# EAGLE board logic2 (EAGLE 7.1.0)
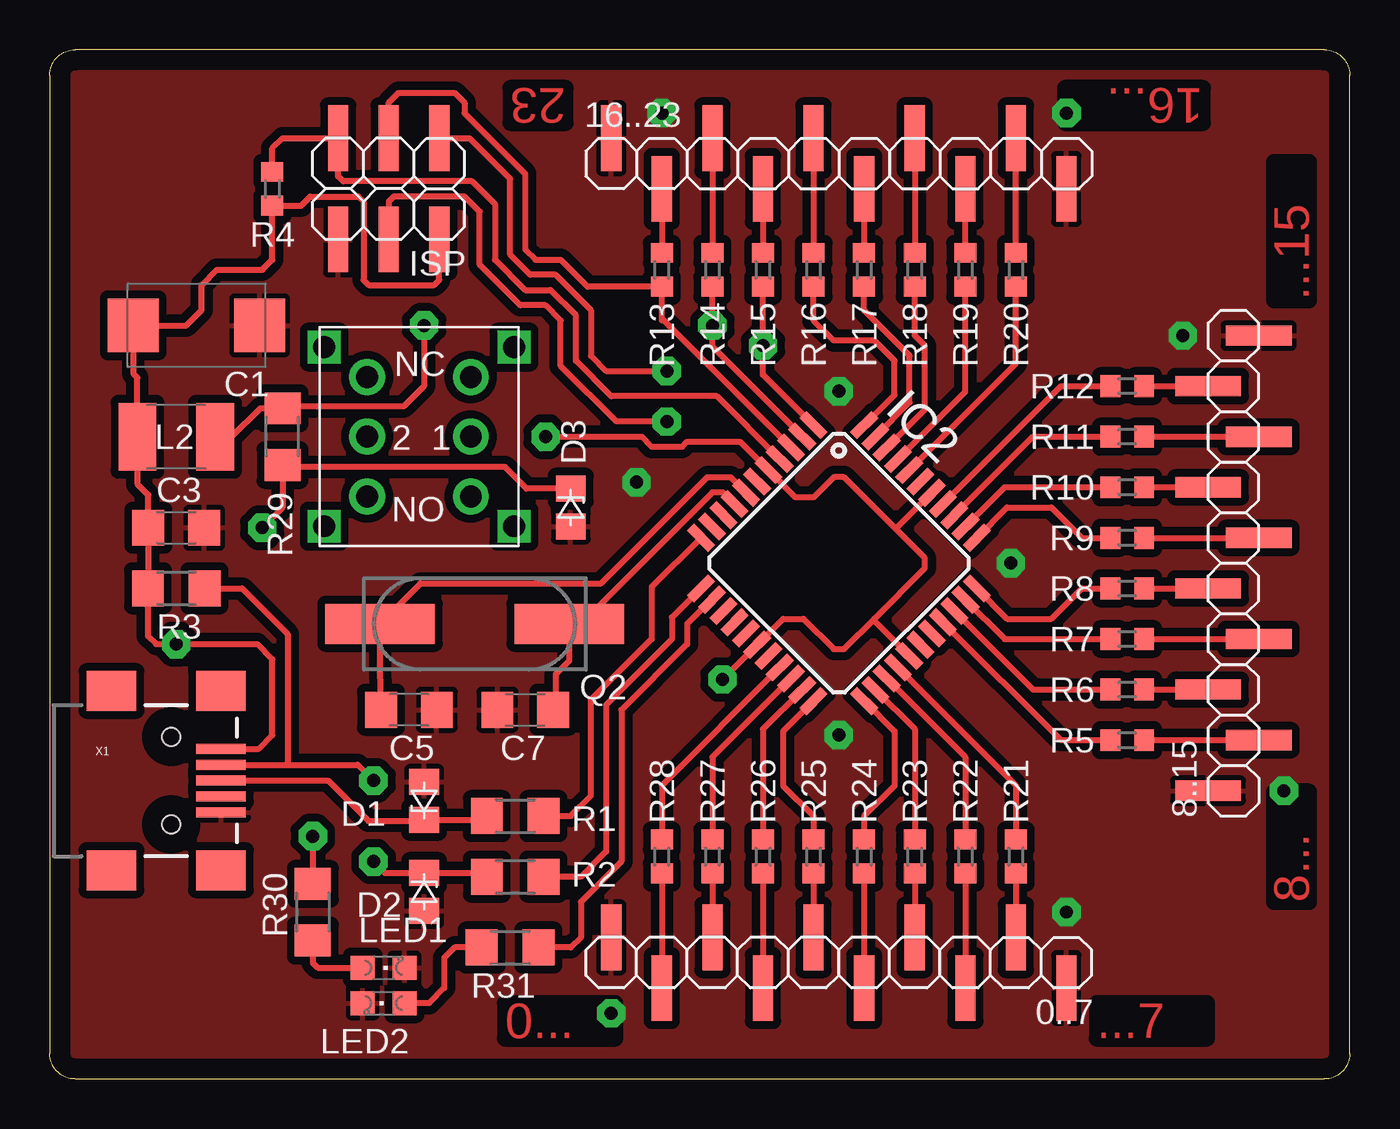
[diagram p0: board, top side]
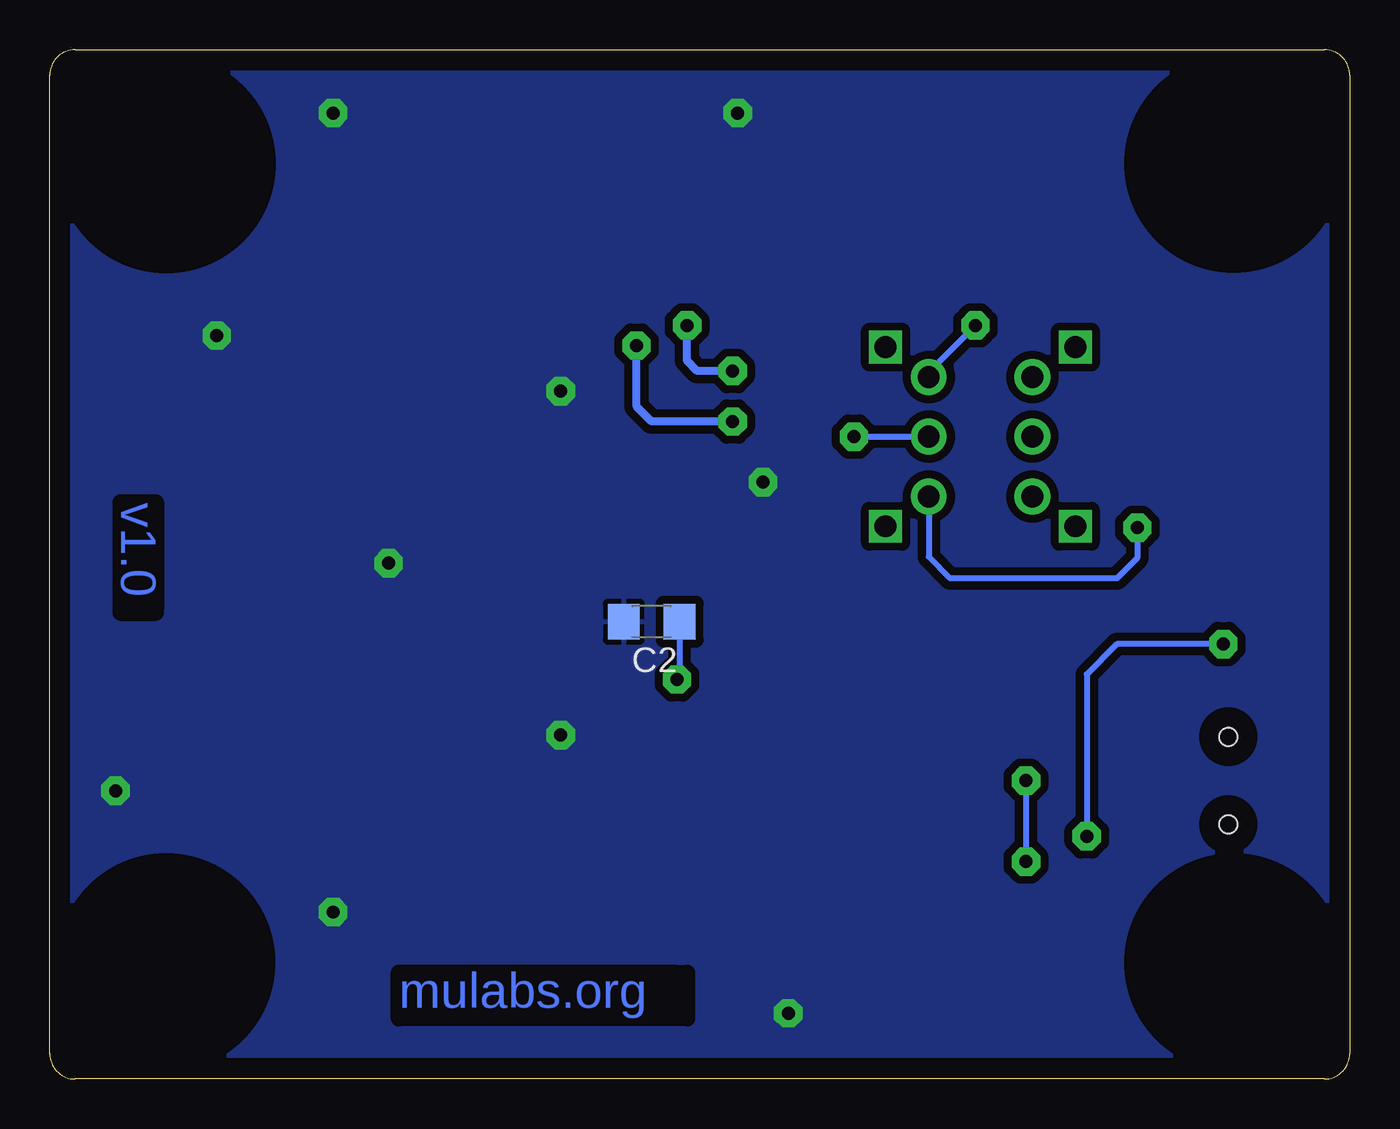
[diagram p1: board, bottom side, seen from below]

Size 65.28 x 51.69 mm. Coordinates in mm from the lower left corner, seen from the top.
Outline: 1.27,0 64.01,0 arc90 65.28,1.27 65.28,50.42 arc90 64.01,51.69 1.27,51.69 arc90 0,50.42 0,1.27 arc90 1.27,0
Copper layers (1*16): Top 0.035mm / dielectric 1.5mm / Bottom 0.035mm
Design rules "default": minimum track width 10mil, minimum drill 24mil, track to track 8mil, track to pad 8mil, pad to pad 8mil, via to via 8mil, smd to smd 8mil, copper to edge 40mil, drill to drill 8mil, minimum pad ring 10mil, minimum via ring 8mil, stop-mask expansion 4mil, vias tented up to drill 0mil, thermal gap 10mil
bRestrict: area 0.8,40.9 to 10.9,51.1; area 0.8,0.8 to 10.9,10.9; area 54.4,0.8 to 64.5,10.9; area 54.3,40.9 to 64.5,51.1; area 33.3,3 to 47.8,5.3; area 59.9,23.6 to 61.7,29

## Footprints (pad centres in the part's own frame; a part is rotated, then mirrored left to right if it is on the bottom)
1X10SMD = smd 1.016 x 3.302: 1 -1.27,1.27; 2 1.27,-1.27; 3 3.81,1.27; 4 6.35,-1.27; 5 8.89,1.27; 6 11.43,-1.27; 7 13.97,1.27; 8 16.51,-1.27; 9 19.05,1.27; 10 21.59,-1.27
D/7343-31R = smd 2.55 x 2.7: + 3.175,0; - -3.175,0
C1206 = smd 1.6 x 1.8: 1 -1.4,0; 2 1.4,0
DIODE-ZENER-0805 = smd 1.3 x 1.5: A -0.95,0; K 0.95,0
TQFP44 = smd 1.5 x 0.5: 1 -5.8,4; 2 -5.8,3.2; 3 -5.8,2.4; 4 -5.8,1.6; 5 -5.8,0.8; 6 -5.8,0; 7 -5.8,-0.8; 8 -5.8,-1.6; 9 -5.8,-2.4; 10 -5.8,-3.2; 11 -5.8,-4; 23 5.8,-4; 24 5.8,-3.2; 25 5.8,-2.4; 26 5.8,-1.6; 27 5.8,-0.8; 28 5.8,0; 29 5.8,0.8; 30 5.8,1.6; 31 5.8,2.4; 32 5.8,3.2; 33 5.8,4 | smd 0.5 x 1.5: 12 -4,-5.8; 13 -3.2,-5.8; 14 -2.4,-5.8; 15 -1.6,-5.8; 16 -0.8,-5.8; 17 0,-5.8; 18 0.8,-5.8; 19 1.6,-5.8; 20 2.4,-5.8; 21 3.2,-5.8; 22 4,-5.8; 34 4,5.8; 35 3.2,5.8; 36 2.4,5.8; 37 1.6,5.8; 38 0.8,5.8; 39 0,5.8; 40 -0.8,5.8; 41 -1.6,5.8; 42 -2.4,5.8; 43 -3.2,5.8; 44 -4,5.8
2X03SMD = smd 1.016 x 3.302: 1 -1.27,-3.81; 2 -1.27,1.27; 3 1.27,-3.81; 4 1.27,1.27; 5 3.81,-3.81; 6 3.81,1.27
L1812 = smd 1.9 x 3.4: 1 -1.95,0; 2 1.95,0
CHIPLED_0805 = smd 1.2 x 1.2: A 0,-1.05; C 0,1.05
CSM-7X-DU = smd 5.5 x 2: 1 -4.75,0; 2 4.75,0
R1206 = smd 1.6 x 1.803: 1 -1.422,0; 2 1.422,0
R0603 = smd 1 x 1.1: 1 -0.85,0; 2 0.85,0
SWITCH-TOP-DPDT = drill 1.1 pad 1.8: 1 0,-2.6; 1NC 3,-2.6; 1NO -3,-2.6; 2 0,2.6; 2NC 3,2.6; 2NO -3,2.6 | drill 1.1 pad 1.422 square: P$7 -4.5,-4.763; P$8 -4.5,4.763; P$9 4.5,-4.763; P$10 4.5,4.763
USB-MINIB = smd 2.5 x 0.5: D+ 2.5,0; D- 2.5,0.8; GND 2.5,-1.6; ID 2.5,-0.8; VBUS 2.5,1.6 | smd 2.5 x 2: MTN1 -3,4.5; MTN2 2.5,4.5; MTN3 -3,-4.5; MTN4 2.5,-4.5 | hole 0.9: 0,2.2; 0,-2.2

## Placement (x,y rotation side)
0..7  [1X10SMD]  49.78,5.84 180 top
8..15  [1X10SMD]  59.44,15.75 90 top
16..23  [1X10SMD]  29.46,45.97 0 top
C1  100µF  [D/7343-31R]  7.37,37.85 180 top
C2  100nF  [C1206]  35.05,22.97 180 bottom
C3  100nF  [C1206]  6.35,27.69 0 top
C5  22p  [C1206]  18.03,18.54 180 top
C7  22p  [C1206]  23.88,18.54 0 top
D1  3.6V  [DIODE-ZENER-0805]  18.8,13.97 270 top
D2  3.6V  [DIODE-ZENER-0805]  18.8,9.4 90 top
D3  3.6V  [DIODE-ZENER-0805]  26.16,28.7 90 top
IC2  ATMEGA32-A,M-A  [TQFP44]  39.62,25.91 315 top
ISP  [2X03SMD]  18.29,43.43 180 top
L2  10µH  [L1812]  6.35,32.26 180 top
LED1  [CHIPLED_0805]  16.76,5.59 270 top
LED2  [CHIPLED_0805]  16.76,3.81 90 top
Q2  16MHz  [CSM-7X-DU]  21.34,22.86 180 top
R1  68Ω  [R1206]  23.37,13.21 180 top
R2  68Ω  [R1206]  23.37,10.16 180 top
R3  1.5k  [R1206]  6.35,24.64 180 top
R4  10kΩ  [R0603]  11.18,44.7 270 top
R5  100Ω  [R0603]  54.1,17.02 180 top
R6  100Ω  [R0603]  54.1,19.56 180 top
R7  100Ω  [R0603]  54.1,22.1 180 top
R8  100Ω  [R0603]  54.1,24.64 180 top
R9  100Ω  [R0603]  54.1,27.18 180 top
R10  100Ω  [R0603]  54.1,29.72 180 top
R11  100Ω  [R0603]  54.1,32.26 180 top
R12  100Ω  [R0603]  54.1,34.8 180 top
R13  100Ω  [R0603]  30.73,40.64 270 top
R14  100Ω  [R0603]  33.27,40.64 270 top
R15  100Ω  [R0603]  35.81,40.64 270 top
R16  100Ω  [R0603]  38.35,40.64 270 top
R17  100Ω  [R0603]  40.89,40.64 270 top
R18  100Ω  [R0603]  43.43,40.64 270 top
R19  100Ω  [R0603]  45.97,40.64 270 top
R20  100Ω  [R0603]  48.51,40.64 270 top
R21  100Ω  [R0603]  48.51,11.18 90 top
R22  100Ω  [R0603]  45.97,11.18 90 top
R23  100Ω  [R0603]  43.43,11.18 90 top
R24  100Ω  [R0603]  40.89,11.18 90 top
R25  100Ω  [R0603]  38.35,11.18 90 top
R26  100Ω  [R0603]  35.81,11.18 90 top
R27  100Ω  [R0603]  33.27,11.18 90 top
R28  100Ω  [R0603]  30.73,11.18 90 top
R29  200Ω  [R1206]  11.68,32.26 270 top
R30  200Ω  [R1206]  13.21,8.38 90 top
R31  200Ω  [R1206]  23.11,6.6 180 top
U$3  SWTICH-DPDT1  [SWITCH-TOP-DPDT]  18.54,32.26 90 top
X1  USBSMD  [USB-MINIB]  6.1,14.99 0 top

## Library data of the parts
0..7 8..15 16..23 ISP = pinhead-1
C1-C3 C5 C7 L2 R1-R31 = rcl
D1-D3 U$3 = mulabs
IC2 = atmega-atxmega; MPN: ATMEGA32-16AU; OC_FARNELL: 9171274; OC_NEWARK: 69K6677
LED1 LED2 = led
Q2 = crystal; OC_FARNELL: unknown; OC_NEWARK: unknown
X1 = SparkFun

## Nets
GND: 0..7.1 0..7.10 8..15.1 8..15.10 16..23.1 16..23.10 C1.- C2.2 C3.2 C5.1 C7.1 D1.A D2.A D3.A IC2.6 IC2.18 IC2.28 IC2.39 ISP.6 LED1.C LED2.C X1.GND
N$1: IC2.12 R2.1
N$2: IC2.11 R1.1
N$3: D1.K R1.2 X1.D+
N$4: D2.K R2.2 R3.1 X1.D-
N$5: C2.1 IC2.5 IC2.17 IC2.27 IC2.38 U$3.1
N$6: IC2.4 ISP.5 R4.1
N$7: IC2.30 R5.2
N$8: IC2.31 R6.2
N$9: IC2.32 R7.2
N$10: IC2.33 R8.2
N$11: IC2.34 R9.2
N$12: LED1.A R30.1
N$13: C7.2 IC2.8 Q2.1
N$14: IC2.35 R10.2
N$15: IC2.36 R11.2
N$16: IC2.37 R12.2
N$17: IC2.3 ISP.3 R13.2
N$18: IC2.2 ISP.1 R14.2
N$19: IC2.44 R16.2
N$20: IC2.1 ISP.4 R15.2
N$21: IC2.43 R17.2
N$22: IC2.42 R18.2
N$23: IC2.40 R20.2
N$24: IC2.41 R19.2
N$25: IC2.26 R21.2
N$26: IC2.25 R22.2
N$27: IC2.23 R24.2
N$28: IC2.21 R26.2
N$29: IC2.19 R28.2
N$30: IC2.24 R23.2
N$31: IC2.22 R25.2
N$32: IC2.20 R27.2
N$33: 8..15.2 R5.1
N$34: 8..15.3 R6.1
N$35: 8..15.4 R7.1
N$36: 8..15.5 R8.1
N$37: 8..15.6 R9.1
N$38: 8..15.7 R10.1
N$39: 8..15.8 R11.1
N$40: 8..15.9 R12.1
N$41: 16..23.2 R13.1
N$42: 16..23.3 R14.1
N$43: 16..23.4 R15.1
N$44: 16..23.5 R16.1
N$45: 16..23.6 R17.1
N$46: 16..23.7 R18.1
N$47: 16..23.8 R19.1
N$48: 16..23.9 R20.1
N$49: 0..7.2 R21.1
N$50: 0..7.3 R22.1
N$51: 0..7.4 R23.1
N$52: 0..7.5 R24.1
N$53: 0..7.6 R25.1
N$54: 0..7.7 R26.1
N$55: 0..7.8 R27.1
N$56: 0..7.9 R28.1
N$57: D3.K R29.2 U$3.1NO
N$58: L2.1 R29.1 U$3.1NC
N$59: C5.2 IC2.7 Q2.2
N$60: IC2.13 R31.1
N$61: LED2.A R31.2
VCC: C1.+ C3.1 ISP.2 L2.2 R3.2 R4.2 R30.2 X1.VBUS

## Tracks (layer width: path | path; a pad name or v marks a point on that pad's centre or on a via)
GND  (via drill 0.65 pad 1.42)
  other vias: 39.62,34.54 39.62,17.27 48.26,25.91 29.46,29.97 28.19,3.3 51.05,8.38 61.98,14.48 56.9,37.34 51.05,48.51 30.73,48.51
  pour Top (isolate 0.406): 0,51.69 65.28,51.69 65.28,0 0,0
  pour Bottom (isolate 0.406): 0,51.69 65.28,51.69 65.28,0 0,0
N$1
  Top 0.305: IC2.12 31.24,23.18 31.24,22.1 27.94,18.8 27.94,11.43 26.67,10.16 R2.1
N$2
  Top 0.305: IC2.11 30.23,24.71 30.23,22.1 27.18,19.05 27.18,14.22 26.16,13.21 R1.1
N$3
  Top 0.305: R1.2 21.76,13.02 D1.K 18.73,12.95 16,12.95 13.97,14.99 X1.D+
N$4  (via drill 0.65 pad 1.42)
  Top 0.305: R2.2 21.76,10.35 D2.K 16.83,10.35 v16.26,10.92 | X1.D- 11.94,15.79 | 11.94,15.79 15.46,15.79 v16.26,14.99 | R3.1 9.65,24.64 11.94,22.35 11.94,15.79
  Bottom 0.305: v16.26,14.99 v16.26,10.92
N$5  (via drill 0.65 pad 1.42)
  Top 0.305: 41.4,23.11 39.88,21.59 39.37,21.59 37.85,23.11 36.83,23.11 IC2.17 v33.78,20.07 | 41.4,23.11 43.94,25.65 43.94,26.16 42.55,27.56 | IC2.38 42.55,27.7 42.55,27.56 | IC2.27 41.4,23 41.4,23.11 | 42.55,27.56 39.88,30.23 39.37,30.23 38.35,29.21 37.45,29.21 IC2.5 34.66,32 32,32 31.75,31.75 30.23,31.75 29.72,32.26 v24.89,32.26
  Bottom 0.305: v24.89,32.26 U$3.1 | C2.1 33.65,20.2 v33.78,20.07
N$6
  Top 0.305: IC2.4 33.51,34.29 28.19,34.29 26.42,36.07 26.42,38.35 25.15,39.62 23.88,39.62 22.35,41.15 22.35,43.94 21.21,45.09 14.73,45.09 14.48,45.34 ISP.5 11.68,47.24 11.18,46.74 R4.1
N$7
  Top 0.305: IC2.30 50.78,17.02 R5.2
N$8
  Top 0.305: IC2.31 49.37,19.56 R6.2
N$9
  Top 0.305: IC2.32 47.96,22.1 R7.2
N$10
  Top 0.305: IC2.33 48.08,23.11 50.29,23.11 51.82,24.64 R8.2
N$11
  Top 0.305: IC2.34 48.08,28.7 50.29,28.7 51.82,27.18 R9.2
N$12
  Top 0.305: R30.1 13.21,5.84 13.46,5.59 LED1.A
N$13
  Top 0.305: IC2.8 33.8,29.46 33.27,29.46 26.67,22.86 Q2.1 26.09,21.01 25.4,20.32 25.4,18.67 C7.2
N$14
  Top 0.305: IC2.35 47.96,29.72 R10.2
N$15
  Top 0.305: IC2.36 49.37,32.26 R11.2
N$16
  Top 0.305: IC2.37 50.78,34.8 R12.2
N$17
  Top 0.305: IC2.3 30.73,38.19 | 30.73,38.19 R13.2 27.01,39.79 25.65,41.15 24.38,41.15 23.88,41.66 23.88,45.47 20.83,48.51 20.83,49.02 20.32,49.53 17.53,49.53 17.02,49.02 ISP.3 | 30.73,38.1 30.73,38.19
N$18  (via drill 0.65 pad 1.42)
  Top 0.305: IC2.2 33.27,36.78 v33.27,37.85 R14.2 | ISP.1 21.08,47.24 23.11,45.21 23.11,41.4 24.13,40.39 25.4,40.39 27.18,38.61 27.18,36.32 27.94,35.56 v30.99,35.56
  Bottom 0.406: v30.99,35.56 32.77,35.56 33.27,36.07 v33.27,37.85
N$19
  Top 0.305: IC2.44 42.42,34.36 42.42,36.07 41.4,37.08 39.37,37.08 38.35,38.1 R16.2
N$20  (via drill 0.65 pad 1.42)
  Top 0.305: IC2.1 35.81,35.38 v35.81,36.83 R15.2 | v30.99,33.02 28.45,33.02 25.65,35.81 25.65,38.1 24.89,38.86 23.62,38.86 21.59,40.89 21.59,43.56 20.83,44.32 17.27,44.32 17.02,44.07 ISP.4
  Bottom 0.406: v30.99,33.02 35.05,33.02 35.81,33.78 v35.81,36.83
N$21
  Top 0.305: IC2.43 43.18,33.99 43.18,36.32 40.89,38.61 R17.2
N$22
  Top 0.305: IC2.42 43.94,33.62 43.94,36.83 43.43,37.34 R18.2
N$23
  Top 0.305: IC2.40 48.51,35.93 R20.2
N$24
  Top 0.305: IC2.41 45.97,34.52 R19.2
N$25
  Top 0.305: IC2.26 48.51,14.76 R21.2
N$26
  Top 0.305: IC2.25 45.97,16.16 R22.2
N$27
  Top 0.305: IC2.23 42.42,17.46 42.42,14.73 40.89,13.21 R24.2
N$28
  Top 0.305: IC2.21 35.81,17.57 R26.2
N$29
  Top 0.305: IC2.19 30.73,14.76 R28.2
N$30
  Top 0.305: IC2.24 43.43,17.57 R23.2
N$31
  Top 0.305: IC2.22 36.83,17.46 36.83,14.73 38.35,13.21 R25.2
N$32
  Top 0.305: IC2.20 33.27,16.16 R27.2
N$33
  Top 0.305: R5.1 8..15.2
N$34
  Top 0.305: R6.1 8..15.3
N$35
  Top 0.305: R7.1 8..15.4
N$36
  Top 0.305: R8.1 8..15.5
N$37
  Top 0.305: R9.1 8..15.6
N$38
  Top 0.305: R10.1 8..15.7
N$39
  Top 0.305: R11.1 8..15.8
N$40
  Top 0.305: R12.1 8..15.9
N$41
  Top 0.305: 16..23.2 R13.1
N$42
  Top 0.305: 16..23.3 R14.1
N$43
  Top 0.305: 16..23.4 R15.1
N$44
  Top 0.305: 16..23.5 R16.1
N$45
  Top 0.305: 16..23.6 R17.1
N$46
  Top 0.305: 16..23.7 R18.1
N$47
  Top 0.305: R19.1 16..23.8
N$48
  Top 0.305: R20.1 16..23.9
N$49
  Top 0.305: R21.1 0..7.2
N$50
  Top 0.305: R22.1 0..7.3
N$51
  Top 0.305: R23.1 0..7.4
N$52
  Top 0.305: R24.1 0..7.5
N$53
  Top 0.305: R25.1 0..7.6
N$54
  Top 0.305: R26.1 0..7.7
N$55
  Top 0.305: R27.1 0..7.8
N$56
  Top 0.305: R28.1 0..7.9
N$57  (via drill 0.65 pad 1.42)
  Top 0.305: v10.67,27.69 11.68,28.7 R29.2 11.79,30.73 22.86,30.73 23.94,29.65 D3.K
  Bottom 0.305: v10.67,27.69 10.67,26.16 11.68,25.15 20.07,25.15 21.14,26.22 U$3.1NO
N$58  (via drill 0.65 pad 1.42)
  Top 0.305: L2.1 9.14,32.26 10.57,33.68 R29.1 11.79,33.78 17.78,33.78 18.8,34.8 v18.8,37.85
  Bottom 0.305: U$3.1NC 21.14,35.5 v18.8,37.85
N$59
  Top 0.305: C5.2 16.59,20.62 Q2.2 18.62,24.89 27.69,24.89 33.02,30.23 34.17,30.23 IC2.7
N$60
  Top 0.305: IC2.13 33.21,24.07 32,22.86 32,21.84 28.7,18.54 28.7,10.92 26.67,8.89 26.67,7.11 26.16,6.6 R31.1
N$61
  Top 0.305: R31.2 20.32,6.6 19.81,6.1 19.81,4.57 19.05,3.81 LED2.A
VCC  (via drill 0.65 pad 1.42)
  Top 0.305: R4.2 12.61,43.85 13.08,44.32 15.49,44.32 15.75,44.07 15.75,40.13 16,39.88 19.3,39.88 19.56,40.13 ISP.2 | 11.14,43.81 R4.2 | R4.2 11.18,41.15 10.67,40.64 8.38,40.64 7.62,39.88 7.62,38.61 6.86,37.85 C1.+ 4.19,35.43 4.4,35.22 L2.2 4.4,29.89 4.95,29.34 C3.1 4.95,24.66 R3.2 4.93,22.25 5.33,21.84 v6.35,21.84 10.41,21.84 11.18,21.08 11.18,17.27 10.49,16.59 X1.VBUS | v13.21,12.19 R30.2
  Bottom 0.305: v6.35,21.84 11.68,21.84 13.21,20.32 v13.21,12.19

## Text on the board
Top: 23 | 16... | ...15 | 8... | 0... | ...7
Bottom: v1.0 | mulabs.org